# Altium PCB PCB1.PcbDoc
Units mm, origin at the board's own origin, x right, y up, seen from the top; angles counter-clockwise.
Board outline 89 x 54 mm, 2 copper layers (Top Layer, Bottom Layer); 38 components, 39 nets, 157 pads, 24 vias.
Unrouted connection lines stored in the file: 1.
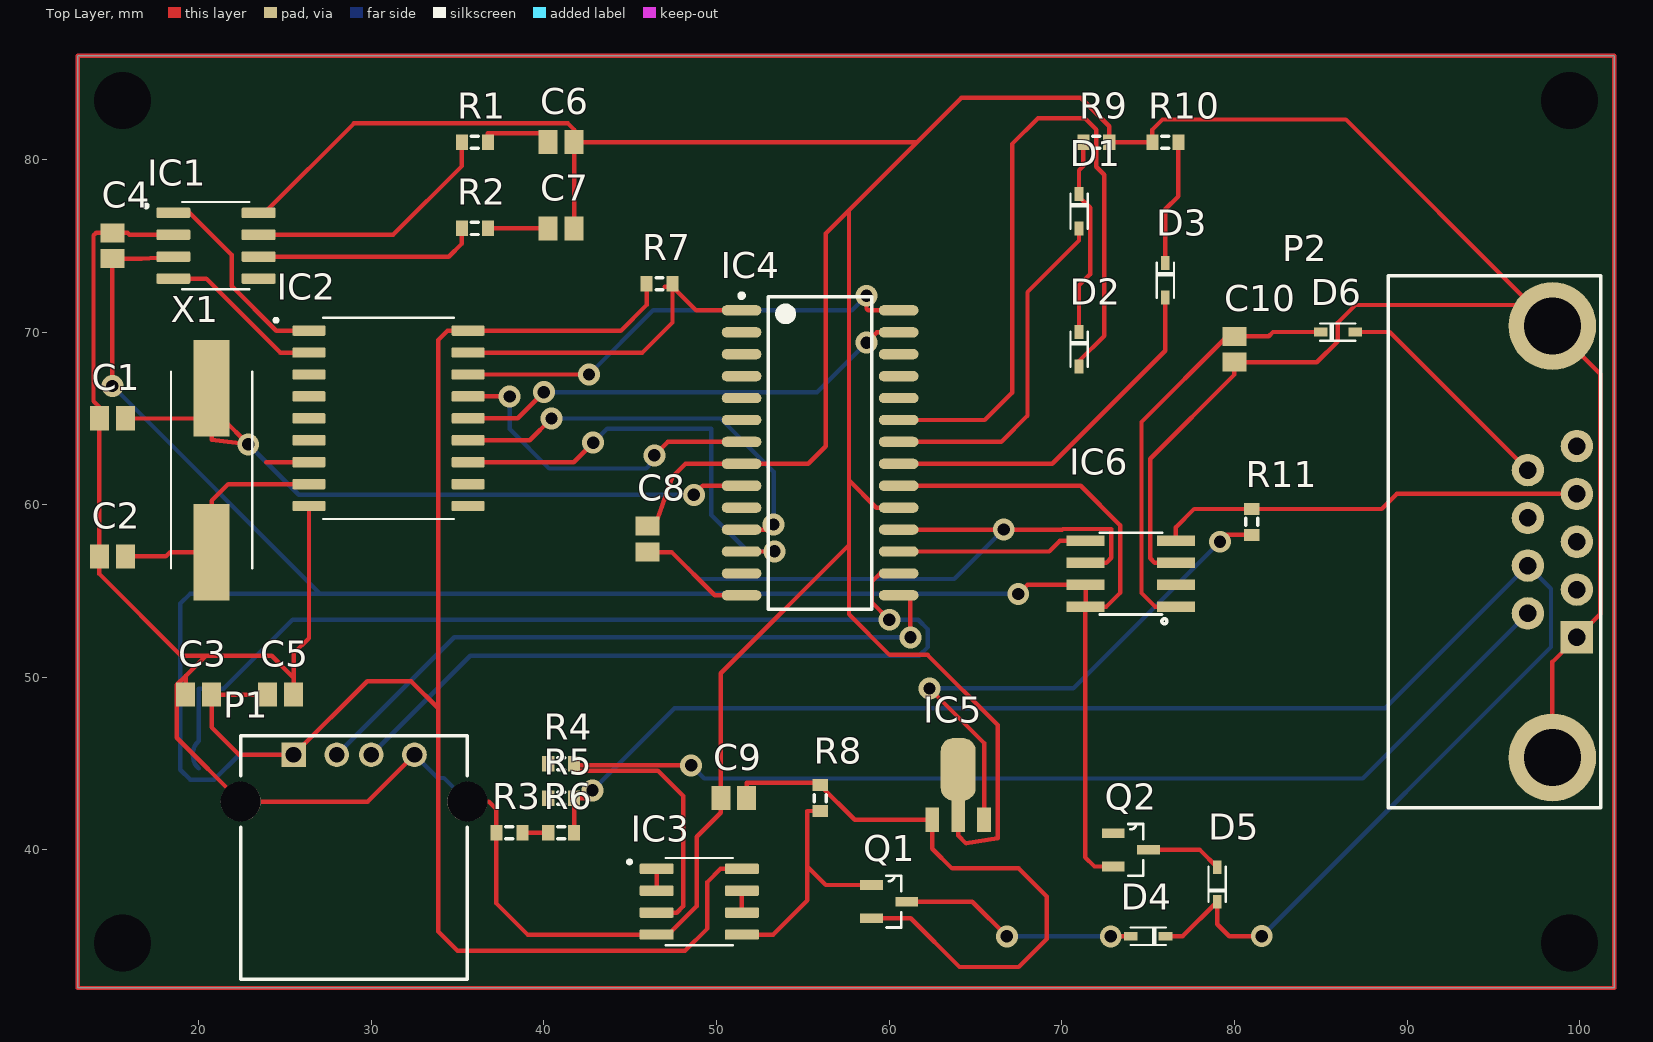
[diagram p0: Top Layer view]
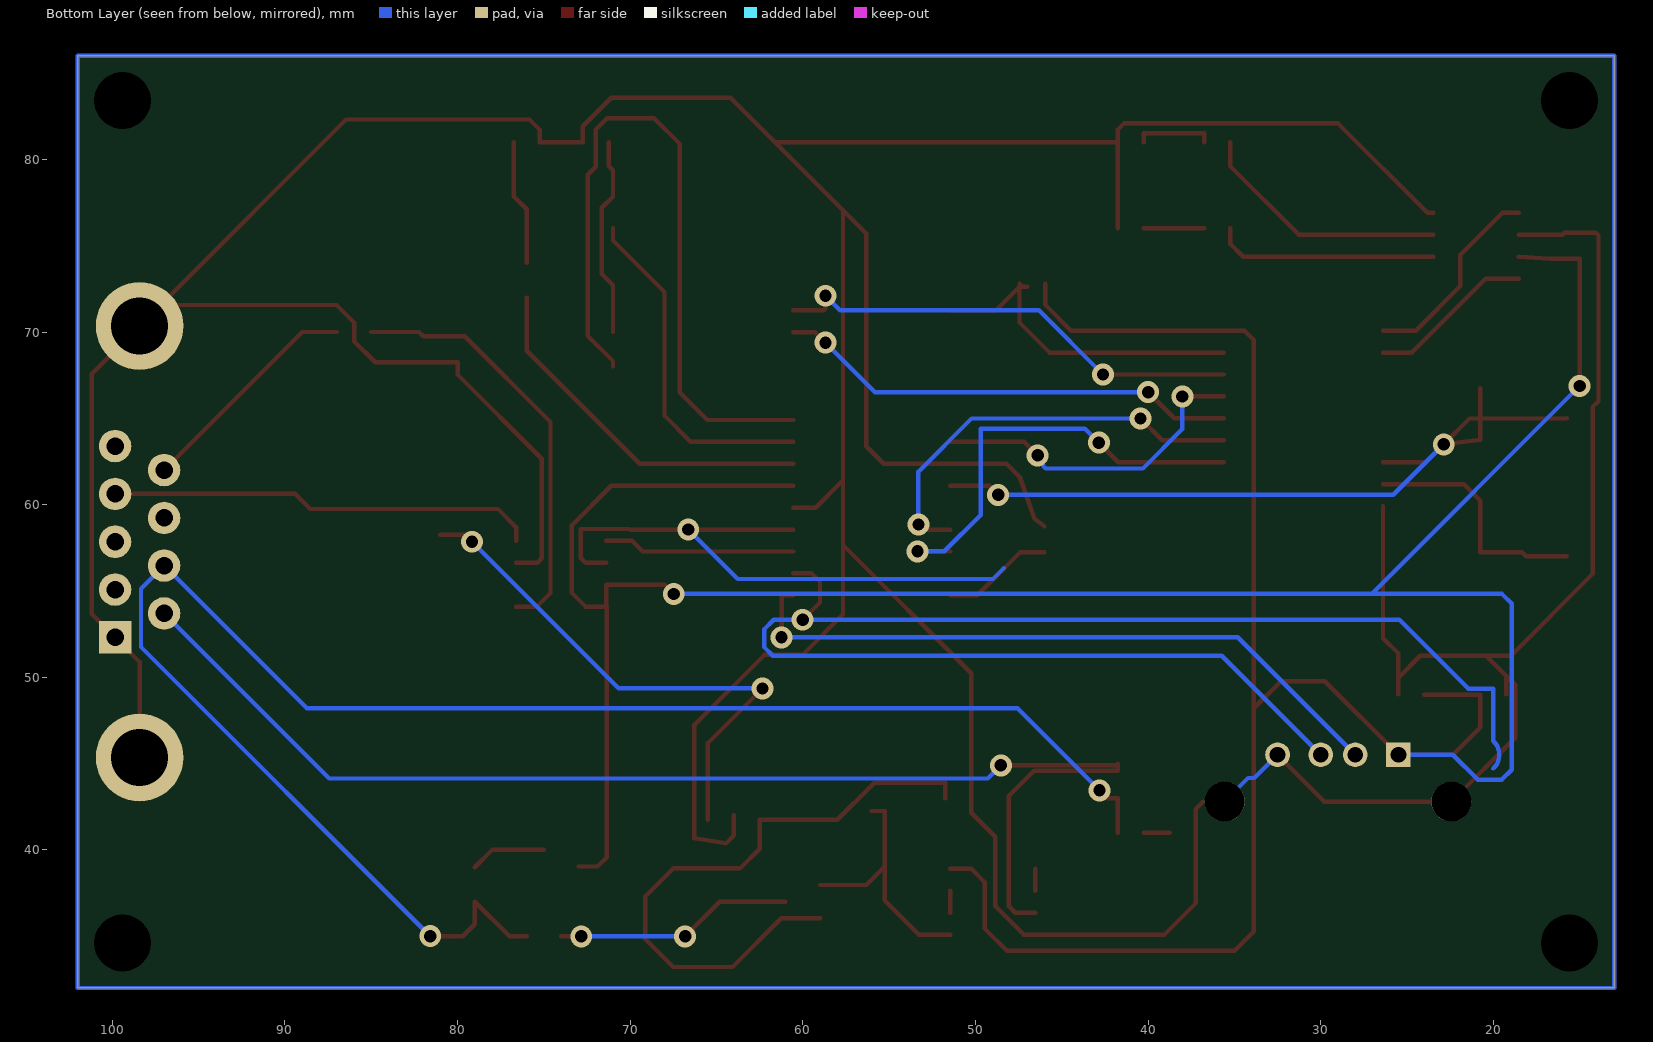
[diagram p1: Bottom Layer view, seen from below]

## Layer stack, top to bottom
Top Solder: solder mask 0.0102, Solder Resist, Dk 3.5
Top Layer: signal copper 0.0356
Dielectric 1: dielectric 0.32, FR-4, Dk 4.8
Bottom Layer: signal copper 0.0356
Bottom Solder: solder mask 0.0102, Solder Resist, Dk 3.5

## Board outline
13,32 13,86 102,86 102,32

## Design rules (kind name [scope] priority, off if disabled: settings)
Clearance [All] p1: gap=0.254 ignorepadtopadclearanceinfootprint=FALSE except(0: Arc-Hole Track-Hole SMDPad-Hole THPad-Hole Via-Hole Fill-Hole Poly-Hole Region-Hole Text-Hole)
PolygonConnect [All] p1: connectstyle=Relief reliefconductorwidth=0.254 reliefentries=4 polygonreliefangle="90 Angle" airgapwidth=0.254
RoutingVias [All] p1: holewidth=0.711 width=1.27 viastyle="Through Hole" minholewidth=0.711 minwidth=1.27 maxholewidth=0.711 maxwidth=1.27
SolderMaskExpansion [All] p1: expansion=0.102 istentingtop=FALSE
Width [All] p1: maxlimit=0.254 minlimit=0.254 preferedwidth=0.254
30 further rules are at their usual default settings.

## Components (designator, comment, footprint, x,y, rotation, side; value= is the part's Value field where it differs from the comment)
C1 "22pF" C0805 15,65 r0 top
C2 "22pF" C0805 15,57 r0 top
C3 "100nF" C0805 20,49 r180 top
C4 "100nF" C0805 15,75 r90 top
C5 "10uF" C0805 24.75,49 r0 top
C6 "560pF" C0805 41,81 r0 top
C7 "560pF" C0805 41,76 r0 top
C8 "470nF" C0805 46,58 r90 top
C9 "100nF" C0805 51,43 r180 top
C10 "100nF" C0805 80,69 r270 top
D1 "Diode" 1N4148 71,77 r90 top
D2 "Diode" 1N4148 71,69 r90 top
D3 "Diode" 1N4148 76,73 r90 top
D4 "Diode" 1N4148 75,35 r0 top
D5 "Diode" 1N4148 79,38 r270 top
D6 "Diode" 1N4148 86,70 r180 top
IC1 "MCP2551" SOIC127P599X175-8N 21,75 r0 top
IC2 "MCP2515" MCP2515 31,65 r0 top
IC3 "SN75452B" SOIC127P599X175-8N 49,37 r0 top
IC4 "PIC18F2455" SOIC-SO28_N 56,63 r0 top
IC5 "L78L08" L78L08 64,43.727 r0 top
IC6 "MC33290" SO08 74,56 r90 top
P1 "USB" USB-A1HSW6 29,39 r0 top
P2 "DB9-M" DB9 98.42,57.85 r90 top
Q1 "BS250" BS250FTA 60,37 r0 top
Q2 "BS250" BS250FTA 74,40 r0 top
R1 "100" J1-0603 36,81 r0 top
R2 "100" J1-0603 36,76 r0 top
R3 "22K" J1-0603 38,41 r0 top
R4 "10K" J1-0603 41,45 r0 top
R5 "10K" J1-0603 41,43 r0 top
R6 "10K" J1-0603 41,41 r0 top
R7 "100" J1-0603 46.7,72.8 r0 top
R8 "4.7K" J1-0603 56,43 r90 top
R9 "330" J1-0603 72,81 r0 top
R10 "330" J1-0603 76,81 r180 top
R11 "510" J1-0603 81,59 r270 top
X1 "16MHZ" X-16.000MHZ-B4 20.75,62 r90 top

## Footprints (in the part's own frame and the unit in brackets; to place one, negate y for a bottom-side part, rotate by r counter-clockwise, add the part's x,y. Pads: shape width x height; smd on the part's side, far side on the other; paste and mask are expansions set on the pad)
1N4148 [mm]
  rect 0.8x0.5 smd: 1(-1,0) 2(1,0)
  silkscreen extent -1.02,-0.5 1.02,0.5, body extent -1.83,-0.77 1.83,0.77, height 0.8
BS250FTA [mil]
  rect 52x22 smd: 1(-40,38) 2(-40,-38) 3(40,0)
  silkscreen extent -6,-59 28,59
C0805 [mm] "Chip Capacitor, Body 2.0x1.3mm, IPC High Density"
  rect 1.1x1.4 smd: 1(-0.75,0) 2(0.75,0)
  body extent -1.1,-0.72 1.1,0.72, height 1.4
DB9 [mil]
  rect 74x74 hole 40: 1(-218.11,-55.9)
  round 74 hole 40: 2(-109.06,-55.9) 3(0,-55.9) 4(109.05,-55.9) 5(218.11,-55.9) 6(-163.39,55.91) 7(-54.33,55.91) 8(54.33,55.91) 9(163.39,55.91)
  round 200 hole 130: G1(-492.13,0) G2(492.13,0)
  silkscreen extent -606,-110 606,374
J1-0603 [mm] "Chip Resistor, Body 1.6x0.8mm, IPC High Density"
  rect 0.7x0.9 smd: 1(-0.75,0) 2(0.75,0)
  silkscreen extent -0.2,-0.35 0.2,0.35, body extent -0.85,-0.48 0.85,0.48, height 0.9
L78L08 [mm]
  rect 0.8x1.4 smd: 1(-1.499,-1.981) 3(1.499,-1.981)
  rect 0.8x1.9 smd paste-2 mask+0: 2(0,-1.727)
  rrect75% 2.032x3.65 smd: 2@1(0,0.94)
MCP2515 [mm]
  rrect25% 1.91x0.6 smd: 1(-4.61,5.08) 2(-4.61,3.81) 3(-4.61,2.54) 4(-4.61,1.27) 5(-4.61,0) 6(-4.61,-1.27) 7(-4.61,-2.54) 8(-4.61,-3.81) 9(-4.61,-5.08) 10(4.61,-5.08) 11(4.61,-3.81) 12(4.61,-2.54) 13(4.61,-1.27) 14(4.61,0) 15(4.61,1.27) 16(4.61,2.54) 17(4.61,3.81) 18(4.61,5.08)
  silkscreen extent -6.62,-5.83 3.8,5.83
SO08 [mil]
  rect 24x87 smd: 1(-75,-103) 2(-25,-103) 3(25,-103) 4(75,-103) 5(75,103) 6(25,103) 7(-25,103) 8(-75,103)
  silkscreen extent -114,-82 93,71, body extent -196,-69 196,106, height 775
SOIC127P599X175-8N [mm]
  rrect25% 1.97x0.6 smd: 1(-2.47,1.905) 2(-2.47,0.635) 3(-2.47,-0.635) 4(-2.47,-1.905) 5(2.47,-1.905) 6(2.47,-0.635) 7(2.47,0.635) 8(2.47,1.905)
  silkscreen extent -4.14,-2.53 1.95,2.53, body extent -3,-2.45 3,2.45, height 1.75
SOIC-SO28_N [mm] "SOIC, 28-Leads, Body 17.9x7.5mm, Pitch 1.27mm, IPC Medium Density"
  oval 2.3x0.6 smd: 1(-4.55,8.255) 2(-4.55,6.985) 3(-4.55,5.715) 4(-4.55,4.445) 5(-4.55,3.175) 6(-4.55,1.905) 7(-4.55,0.635) 8(-4.55,-0.635) 9(-4.55,-1.905) 10(-4.55,-3.175) 11(-4.55,-4.445) 12(-4.55,-5.715) 13(-4.55,-6.985) 14(-4.55,-8.255) 15(4.55,-8.255) 16(4.55,-6.985) 17(4.55,-5.715) 18(4.55,-4.445) 19(4.55,-3.175) 20(4.55,-1.905) 21(4.55,-0.635) 22(4.55,0.635) 23(4.55,1.905) 24(4.55,3.175) 25(4.55,4.445) 26(4.55,5.715) 27(4.55,6.985) 28(4.55,8.255)
  silkscreen extent -4.67,-9.05 3,9.23, body extent -3.8,-9.06 3.8,9.06, height 2.65
USB-A1HSW6 [mm]
  rect 1.428x1.428 hole 0.92: 1(-3.5,6.51)
  round 1.428 hole 0.92: 2(-1,6.51) 3(1,6.51) 4(3.5,6.51)
  round 2.3 hole 2.3 unplated: S1(-6.57,3.8) S2(6.57,3.8)
  silkscreen extent -6.55,-6.5 6.55,7.6
X-16.000MHZ-B4 [mm]
  rect 5.6x2.1 smd: 1(-4.75,0) 2(4.75,0)
  silkscreen extent -5.7,-2.35 5.7,2.35, body extent -6.35,-2.35 6.35,2.35, height 4.06

## Part data
C1 C2 C6 C7: library part Cap, "Capacitor", LatestRevisionDate=29-May-2009, LatestRevisionNote="IPC-7351 Footprint Added.", PackageDescription="Chip Capacitor", PackageReference=C0805, Published=8-Jun-2000, Publisher="Altium Limited"
C3 C4 C5 C8 C9 C10: library part "Cap External", "Capacitor with a designated external electrode", LatestRevisionDate=29-May-2009, LatestRevisionNote="IPC-7351 Footprint Added.", PackageDescription="Chip Capacitor", PackageReference=C0805, Published=8-Jun-2000, Publisher="Altium Limited"
D1 D2 D3 D4 D5 D6: "Default Diode", Code_JEDEC=DO-214-AB, LatestRevisionDate=17-Jul-2002, LatestRevisionNote="Re-released for DXP Platform.", PackageDescription="DO-214-AB/SMC; 2 C-Bend Leads; Body 7.9 x 5.9 mm, inc. leads (LxW)", PackageReference=SMC, PackageVersion=Sep-1996, Published=8-Jun-2000, Publisher="Altium Limited"
IC1: library part MCP2551-I/SN, Package=None, Availability=Unavailable, MP=MCP2551-I/SN, Price=None
IC2: library part MCP2515-E/SO, "CANbus Controller CAN 2.0 SPI Interface 18-SOIC", Package="SOIC-18 Microchip", Availability=Unavailable, MF=Microchip, MP=MCP2515-E/SO, Price=None, SnapEDA_Link=https://www.snapeda.com/parts/MCP2515-E/SO/Microchip/view-part/100602/?ref=snap
IC3: library part SN75452BD, "30-V Dual output driver with NAND logic inputs", Package="SOIC-8 Texas Instruments", Availability="In Stock", Check_prices=https://www.snapeda.com/parts/SN75452BD/Texas+Instruments/view-part/?ref=eda, MF="Texas Instruments", MP=SN75452BD, Price=None, Purchase-URL=https://pricing.snapeda.com/search/part/SN75452BD/?ref=eda, SnapEDA_Link=https://www.snapeda.com/parts/SN75452BD/Texas+Instruments/view-part/?ref=snap
IC4: library part PIC18F2455-I/SO, "High Performance, Enhanced Flash, USB Microcontroller with nanoWatt Technology, 24K Flash, 28-Pin SOIC, Industrial Temperature Range", Supplier Part Number 1=PIC18F2455-I/SO-ND, Code_JEDEC=MS-013, ComponentLink1Description=Datasheet, ComponentLink1URL=http://ww1.microchip.com/downloads/en/DeviceDoc/39632e.pdf, ComponentLink2Description="Packaging Specification", ComponentLink2URL=http://www.microchip.com/stellent/groups/techpub_sg/documents/packagingspec/en012702.pdf, ComponentLink3Description="Microchip.com Home", ComponentLink3URL=http://www.microchip.com/, DatasheetVersion="revE, Aug-2008", LatestRevisionDate=02-Dec-2009, LatestRevisionNote="Updated to datasheet revision E, Aug-2008", PackageDescription="28-Lead Plastic Small Outline (SO) - Wide 7.50mm Body [SOIC]", PackageReference=SOIC-SO28, PackageVersion="revBB, Aug-2009", Published=29-Jan-2009, Publisher="Altium Limited", Supplier 1=Digi-Key, Supplier 2=Farnell, Supplier Part Number 2=1579598
IC5: library part L78L05ACU, "Linear Voltage Regulator IC 1 Output 100mA SOT-89-3", Package="SOT-89-3 STMicroelectronics", Availability=Unavailable, MF=STMicroelectronics, MP=L78L05ACU, Price=None, SnapEDA_Link=https://www.snapeda.com/parts/L78L05ACU/STMicroelectronics/view-part/1236826/?ref=snap
IC6: "Heat Sink; Packages Cooled:TO-220; Thermal Resistance:8.8Â°C/W; Width:34.5mm; Height:50mm; Length:12.5mm; Mounting Type:PC Board Thru Hole; Package / Case:TO-220 ;RoHS Compliant: Yes", Package="TO-220-3 ON Semiconductor", Availability="In Stock", Check_prices=https://www.snapeda.com/parts/MC33290/NXP+USA+Inc./view-part/?ref=eda, MF="NXP USA", MP=MC33290, Price=None, SnapEDA_Link=https://www.snapeda.com/parts/MC33290/NXP+USA+Inc./view-part/?ref=snap
P1: library part USB-A1HSW6, "USB - A Receptacle Connector 4 Position Through Hole, Right Angle", Package=None, Availability=Unavailable, MP=USB-A1HSW6, Price=None
Q1 Q2: library part BS250FTA, "P-Channel 45V 90mA (Ta) 330mW (Ta) Surface Mount SOT-23-3", Package="SOT-23-3 Diodes Inc.", Availability=Unavailable, DigiKey-Purchase-URL=https://snapeda.com/shop?store=DigiKey&id=699, MF="Diodes Inc.", MP=BS250FTA, Price=None, SnapEDA_Link=https://www.snapeda.com/parts/BS250FTA/Diodes%20Inc./view-part/699/?ref=snap
R1 R2 R3 R4 R5 R6 R7 R8 R9 R10 R11: library part Res3, "Resistor", LatestRevisionDate=29-May-2009, LatestRevisionNote="IPC-7351 Footprint Added.", PackageDescription="Chip Resistor", PackageReference=J1-0603, Published=8-Jun-2000, Publisher="Altium Limited"
X1: library part ABLS-16.000MHZ-B4, "16 MHz Â±30ppm Crystal 18pF 40 Ohms HC-49/US", Package="HC-49/US Abracon LLC", Availability="In Stock", Check_prices=https://www.snapeda.com/parts/ABLS-16.000MHZ-B4/Abracon/view-part/?ref=eda, MF=Abracon, MP=ABLS-16.000MHZ-B4, Price=None, Purchase-URL=https://pricing.snapeda.com/search/part/ABLS-16.000MHZ-B4/?ref=eda, SnapEDA_Link=https://www.snapeda.com/parts/ABLS-16.000MHZ-B4/Abracon/view-part/?ref=snap

## Free pads (board coordinates)
  round 2.5 hole 3.302: 1(15.6,34.6) 1(15.6,83.4) 1(99.4,34.6) 1(99.4,83.4)

## Via types
v1: diameter 1.27, hole 0.711, Top Layer to Bottom Layer, 24 vias

## Nets (pads, with @x,y where several pads share a name; then routed paths per layer and width w, separated by ;. In a path a pad name is that pad's centre, name@x,y a point inside that pad or via, vN(x,y) a via of type N, cw(c..) or ccw(c..) an arc to the next point about the centre after c; other vN are vias at no path point)
+5: C3.1 C4.1 C5.1 IC1.3 IC2.18 IC3.8 IC4.20 IC6.7 IC6.8 P1.1 Q2.2 R7.1 | length 226.9
  Top Layer w0.254: C4.1 C4.1@15.002,74.25 ; v1(15.002,66.869) C4.1@15.002,74.25 ; IC1.3 16.704,74.25 C4.1@15.002,74.25 ; C3.1 C3.1@20.75,48.987 ; C5.1 24,48.987 C3.1@20.75,48.987 ; R7.1 45.95,71.568 44.462,70.08 IC2.18 34.418,70.08 33.874,69.536 33.874,48.2 ; IC3.8 50.232,38.905 49.47,38.143 49.47,35.449 48.175,34.154 34.992,34.154 33.874,35.271 33.874,48.2 ; IC4.20 71.096,61.095 73.378,58.813 73.378,54.889 72.584,54.095 IC6.8 ; v1(67.476,54.829) 68.012,55.365 IC6.7 IC6.8 ; Q2.2 71.894,39.035 71.365,39.564 71.365,54.095 IC6.8 ; C3.1@20.75,48.987 20.75,47.1 22.34,45.51 P1.1 29.76,49.77 32.305,49.77 33.874,48.2
  Bottom Layer w0.254: v1(15.002,66.869) 27.042,54.829 ; P1.1 22.345,45.51 20.895,44.06 19.523,44.06 18.939,44.644 18.939,54.271 19.498,54.829 27.042,54.829 ; v1(67.476,54.829) 27.042,54.829
+12: IC5.3 R11.2 | length 31.3
  Top Layer w0.254: v1(62.335,49.356) 65.499,46.192 IC5.3 ; v1(79.163,57.852) 79.561,58.25 R11.2
  Bottom Layer w0.254: v1(62.335,49.356) 70.666,49.356 v1(79.163,57.852)
GND: C1.1 C2.1 C3.2 C4.2 C5.2 C6.2 C7.2 C8.2 C9.2 C10.2 IC1.2 IC1.8 IC2.9 IC3.4 IC4.8 IC4.19 IC5.2 IC6.3 P1.4 P1.S1 P1.S2 P2.1 P2.G1 P2.G2 R3.1 R9.2 R10.2 | length 355.8
  Top Layer w0.254: IC1.2 15.993,75.635 15.878,75.75 C4.2 14.062,75.75 13.91,75.598 13.91,65.99 14.25,65.65 C1.1 C2.1 14.25,55.98 18.982,51.248 20.418,51.248 ; C3.2 19.25,50.08 ; IC1.8 23.816,76.905 28.995,82.084 41.394,82.084 41.75,81.728 C6.2 C6.2@41.75,80.996 ; C5.2 25.5,49.979 ; IC2.9 26.39,52.264 25.5,51.374 25.5,49.979 ; P1.4 29.79,42.8 P1.S1 18.736,46.494 18.736,49.566 19.25,50.08 ; P1.S2 36.808,42.8 37.25,42.358 R3.1 37.25,36.901 39.056,35.095 IC3.4 47.209,35.095 48.86,36.746 48.86,40.758 50.25,42.147 C9.2 50.25,50.232 57.673,57.655 ; C7.2 41.75,78.477 C6.2@41.75,80.996 ; C8.2 46.573,59.173 47.439,61.604 47.505,61.67 48.2,62.365 IC4.8 55.312,62.365 56.328,63.381 56.328,75.708 57.673,77.053 ; IC4.19 59.256,59.825 57.673,61.408 ; IC5.2 64,40.833 64.456,40.377 66.285,40.682 66.285,47.236 62.225,51.296 60.023,51.296 57.673,53.646 57.673,57.655 ; IC6.3 75.378,56.635 75.124,56.889 75.124,62.662 80.001,67.539 C10.2 84.776,68.25 85.995,69.469 85.995,70.552 87.011,71.568 P2.G2@97.202,71.568 ; P2.G1 98.42,50.89 P2.1 101.184,53.654 101.184,67.586 P2.G2 P2.G2@97.202,71.568 ; 19.25,50.08 20.418,51.248 ; 20.418,51.248 24.23,51.248 25.5,49.979 ; C6.2@41.75,80.996 61.616,80.996 ; 57.673,57.655 57.673,61.408 ; 57.673,61.408 57.673,77.053 ; 57.673,77.053 61.616,80.996 ; 61.616,80.996 64.184,83.564 71.104,83.564 72.75,81.918 R9.2 R10.2 75.25,81.728 75.834,82.312 86.458,82.312 P2.G2@97.202,71.568
  Bottom Layer w0.254: P1.4 33.849,44.161 34.209,44.161 P1.S2
NetC1_2: C1.2 IC2.7 IC4.9 X1.2 | length 45.4
  Top Layer w0.254: C1.2 15.75,64.989 X1.2@20.75,64.989 ; X1.2 X1.2@20.75,64.989 ; 23.918,62.449 23.928,62.46 IC2.7 ; v1(48.683,60.57) 49.208,61.095 IC4.9 ; X1.2@20.75,64.989 21.378,64.989 v1(22.873,63.494) 20.75,63.766 X1.2@20.75,64.989
  Bottom Layer w0.254: v1(22.873,63.494) 23.918,62.449 ; 23.928,62.46 23.918,62.449 ; v1(48.683,60.57) 25.797,60.57 23.918,62.449
NetC2_2: C2.2 IC2.8 X1.1 | length 14.1
  Top Layer w0.254: C2.2 18.101,57 18.351,57.25 X1.1 20.75,60.229 21.71,61.19 IC2.8
NetC6_1: C6.1 R1.2 | length 4.5
  Top Layer w0.254: R1.2 36.75,81.525 40.25,81.525 C6.1
NetC7_1: C7.1 R2.2 | length 3.5
  Top Layer w0.254: R2.2 C7.1
NetC8_1: C8.1 IC4.14 | length 6.5
  Top Layer w0.254: C8.1 47.397,57.25 49.902,54.745 IC4.14
NetC9_1: C9.1 IC5.1 Q1.2 R8.2 | length 36.4
  Top Layer w0.254: C9.1 51.75,43.895 55.855,43.895 R8.2 58.004,41.746 IC5.1 62.501,40.072 63.644,38.929 67.504,38.929 69.13,37.303 69.13,34.84 67.504,33.214 64.075,33.214 61.254,36.035 Q1.2
NetC10_1: C10.1 D6.2 IC6.1 | length 24.8
  Top Layer w0.254: IC6.1 75.401,54.095 74.616,54.88 74.616,64.786 79.58,69.75 C10.1 81.986,69.75 82.236,70 D6.2
NetD1_1: D1.1 IC4.22 | length 20.2
  Top Layer w0.254: IC4.22 66.488,63.635 68.012,65.159 68.012,72.314 71,75.302 D1.1
NetD1_2: D1.2 D2.2 R9.1 | length 11.6
  Top Layer w0.254: D2.2 71,72.711 71.644,73.355 71.644,77.198 71,77.842 D1.2 71,79.366 71.25,79.616 R9.1
NetD2_1: D2.1 IC4.23 | length 41.9
  Top Layer w0.254: IC4.23 65.54,64.905 67.123,66.488 67.123,80.89 68.622,82.388 71.339,82.388 72,81.728 72,79.569 72.457,79.112 72.457,69.774 71,68.317 D2.1
NetD3_1: D3.1 IC4.21 | length 21.2
  Top Layer w0.254: IC4.21 69.452,62.365 76,68.913 D3.1
NetD3_2: D3.2 R10.1 | length 7.3
  Top Layer w0.254: D3.2 76,77.105 76.75,77.855 R10.1
NetD4_1: D4.1 Q1.3 | length 13.8
  Top Layer w0.254: Q1.3 64.812,37 v1(66.82,34.992) ; v1(72.838,34.992) 72.846,35 D4.1
  Bottom Layer w0.254: v1(66.82,34.992) v1(72.838,34.992)
NetD4_2: D4.2 D5.2 P2.7 R5.2 R6.2 | length 99.8
  Top Layer w0.254: R6.2 R5.2 42.365,43 v1(42.815,43.45) ; D4.2 77,35 D5.2 79,35.696 79.696,35 v1(81.584,35)
  Bottom Layer w0.254: v1(42.815,43.45) 47.565,48.2 88.73,48.2 P2.7 98.34,55.13 98.34,51.756 v1(81.584,35)
NetD5_1: D5.1 Q2.3 | length 4.4
  Top Layer w0.254: Q2.3 78,40 D5.1
NetD6_1: D6.1 P2.9 | length 13.3
  Top Layer w0.254: D6.1 89,70 P2.9
NetIC1_1: IC1.1 IC2.1 | length 11.7
  Top Layer w0.254: IC1.1 19.473,76.905 21.911,74.467 21.911,72.66 24.491,70.08 IC2.1
NetIC1_4: IC1.4 IC2.2 | length 9.6
  Top Layer w0.254: IC1.4 20.445,73.095 24.73,68.81 IC2.2
NetIC1_6: IC1.6 R2.1 | length 13
  Top Layer w0.254: IC1.6 34.491,74.365 35.25,75.124 R2.1
NetIC1_7: IC1.7 R1.1 | length 14.8
  Top Layer w0.254: IC1.7 31.265,75.635 35.25,79.62 R1.1
NetIC2_12: IC2.12 IC4.12 | length 26.3
  Top Layer w0.254: IC2.12 41.723,62.46 v1(42.855,63.592) ; IC4.12 53.348,57.285 v1(53.356,57.293)
  Bottom Layer w0.254: v1(42.855,63.592) 43.668,64.405 49.691,64.405 49.704,59.4 49.7,59.397 51.804,57.293 v1(53.356,57.293)
NetIC2_13: IC2.13 IC4.11 | length 24.5
  Top Layer w0.254: IC2.13 39.183,63.73 v1(40.442,64.989) ; IC4.11 53.009,58.555 v1(53.305,58.852)
  Bottom Layer w0.254: v1(40.442,64.989) 50.224,64.989 53.305,61.908 v1(53.305,58.852)
NetIC2_14: IC2.14 IC4.27 | length 27
  Top Layer w0.254: IC2.14 38.482,65 v1(39.996,66.513) ; v1(58.69,69.384) 59.292,69.985 IC4.27
  Bottom Layer w0.254: v1(39.996,66.513) 55.82,66.513 v1(58.69,69.384)
NetIC2_15: IC2.15 IC4.7 | length 19.5
  Top Layer w0.254: IC2.15 v1(38.015,66.27) ; v1(46.397,62.856) 47.176,63.635 48.7,63.635 IC4.7
  Bottom Layer w0.254: v1(38.015,66.27) 38.015,64.38 40.301,62.094 45.932,62.094 46.081,62.243 46.081,62.265 46.397,62.581 v1(46.397,62.856)
NetIC2_16: IC2.16 IC4.28 | length 39.1
  Top Layer w0.254: IC2.16 v1(42.612,67.54) ; v1(58.69,72.101) 58.69,71.348 58.784,71.255 IC4.28
  Bottom Layer w0.254: v1(42.612,67.54) 46.327,71.255 ; 57.8,71.255 46.327,71.255 ; v1(58.69,72.101) 57.844,71.255 46.327,71.255
NetIC2_17: IC2.17 IC4.1 R7.2 | length 20.1
  Top Layer w0.254: IC2.17 37.938,68.81 45.708,68.81 47.45,70.552 R7.2@47.45,72.621 ; 47,72.63 R7.2@47.28,72.63 ; IC4.1 49.681,71.255 48.816,71.255 R7.2@47.45,72.621 ; R7.2@47.28,72.63 47.441,72.63 R7.2@47.45,72.621 ; R7.2@47.28,72.63 R7.2 R7.2@47.45,72.621
NetIC3_1: IC3.1 IC3.2 | length 1.3
  Top Layer w0.254: IC3.2 IC3.1
NetIC3_3: IC3.3 P2.6 R4.2 | length 74.9
  Top Layer w0.254: R4.2 R4.2@41.75,44.898 ; IC3.3 47.692,36.365 48.073,36.746 48.073,43.12 46.601,44.592 41.75,44.592 R4.2@41.75,44.898 ; v1(48.53,44.898) R4.2@41.75,44.898
  Bottom Layer w0.254: v1(48.53,44.898) 49.292,44.136 87.436,44.136 P2.6
NetIC3_5: IC3.5 Q1.1 R8.1 | length 14.7
  Top Layer w0.254: IC3.5 53.281,35.095 55.261,37.075 55.261,39.032 ; R8.1 55.261,42.25 55.261,39.032 ; Q1.1 56.328,37.965 55.261,39.032
NetIC3_6: IC3.6 IC3.7 | length 1.3
  Top Layer w0.254: IC3.6 IC3.7
NetIC4_15: IC4.15 P1.2 | length 39.2
  Top Layer w0.254: IC4.15 61.23,54.745 v1(61.23,52.315)
  Bottom Layer w0.254: P1.2 34.805,52.315 v1(61.23,52.315)
NetIC4_16: IC4.16 P1.3 | length 101.7
  Top Layer w0.254: v1(60.011,53.331) 59.007,54.335 59.007,55.545 59.478,56.015 IC4.16
  Bottom Layer w0.254: P1.3 35.738,51.248 61.738,51.248 62.246,51.756 62.246,52.772 61.687,53.331 v1(60.011,53.331) 25.442,53.331 21.454,49.343 20,49.343 20,46.308 ; 20,44.712 cw(c20.75,45.51) 20,46.308 ; 20,44.712 cw(c20.75,45.51) 20,46.308 ; 20,44.712 cw(c20.75,45.51) 20,46.308 ; 20,44.712 cw(c20.75,45.51) 20,46.308 ; 20,44.712 cw(c20.75,45.51) 20,46.308 ; 20,44.712 cw(c20.75,45.51) 20,46.308 ; 20,44.712 cw(c20.75,45.51) 20,46.308 ; 20,44.712 cw(c20.75,45.51) 20,46.308
NetIC4_17: IC4.17 IC6.5 | length 11.1
  Top Layer w0.254: IC4.17 69.272,57.285 69.892,57.905 IC6.5
NetIC4_18: IC4.18 IC6.6 | length 41.4
  Top Layer w0.254: v1(66.64,58.563) 66.632,58.555 IC4.18 70.01,58.555 70.046,58.591 72.87,58.591 72.87,56.921 72.584,56.635 IC6.6
  Bottom Layer w0.254: 48.352,56.328 48.987,55.693 63.77,55.693 v1(66.64,58.563)
NetIC6_4: IC6.4 P2.4 R11.1 | length 24.8
  Top Layer w0.254: IC6.4 76.597,57.905 76.597,58.683 77.664,59.75 R11.1 88.535,59.75 89.405,60.62 P2.4
NetR3_2: R3.2 R6.1 | length 1.5
  Top Layer w0.254: R3.2 R6.1
pads on no net: IC1.5 IC2.3 IC2.4 IC2.5 IC2.6 IC2.10 IC2.11 IC4.2 IC4.3 IC4.4 IC4.5 IC4.6 IC4.10 IC4.13 IC4.24 IC4.25 IC4.26 IC5.2@1 IC6.2 P2.2 P2.3 P2.5 P2.8 Q2.1 R4.1 R5.1

## Other copper
Multi-Layer:
  the board outline again, w0.254

## Silkscreen, mask and mechanical layers (free items; w line width, h text height)
Drill Drawing:
  circle w0.254: c14.556,9.61 r0.847
  lines w0.254: 13.709,1.144 14.556,1.567 15.403,1.144 14.979,1.99 15.403,2.837 14.556,2.413 13.709,2.837 14.133,1.99 13.709,1.144 ; 13.709,4.954 15.403,4.954 15.403,6.647 13.709,6.647 13.709,4.954 ; 13.709,14.267 15.403,14.267 14.556,12.574 13.709,14.267 ; 13.709,16.807 14.133,16.807 14.556,16.384 14.979,16.807 15.403,16.807 14.979,17.23 15.403,17.653 14.979,17.653 14.556,18.077 14.133,17.653 13.709,17.653 14.133,17.23 13.709,16.807
  lines w0.381: 12.19,0.001 280.188,0.001 ; 12.19,19.051 280.188,19.051 ; 26.183,-3.809 26.183,22.861 ; 39.895,-3.809 39.895,22.861 ; 69.604,-3.809 69.604,22.861 ; 82.454,-3.809 82.454,22.861 ; 101.092,-3.809 101.092,22.861 ; 139.181,-3.809 139.181,22.861 ; 154.163,-3.809 154.163,22.861 ; 173.106,-3.809 173.106,22.861 ; 189.612,-3.809 189.612,22.861 ; 211.298,-3.809 211.298,22.861 ; 245.171,-3.809 245.171,22.861 ; 12.19,-3.809 280.188,-3.809 280.188,22.861 12.19,22.861 12.19,-3.809
  text "Symbol" at 14.476,20.194 h1.83
  text "Count" at 27.326,20.194 h1.83
  text "Hole Size" at 41.038,20.194 h1.83
  text "Plated" at 70.747,20.194 h1.83
  text "Hole Type" at 83.597,20.194 h1.83
  text "Drill Layer Pair" at 102.235,20.194 h1.83
  text "Via/Pad" at 140.324,20.194 h1.83
  text "Pad Shape" at 155.306,20.194 h1.83
  text "Template" at 174.249,20.194 h1.83
  text "Description" at 190.755,20.194 h1.83
  text "Hole Tolerance (+)" at 212.441,20.194 h1.83
  text "Hole Tolerance (-)" at 246.314,20.194 h1.83
  text "2" at 27.326,16.384 h1.52
  text "90,55mil (2,300mm)" at 41.038,16.384 h1.52
  text "NPTH" at 70.747,16.384 h1.52
  text "Round" at 83.597,16.384 h1.52
  text "Top Layer - Bottom Layer" at 102.235,16.384 h1.52
  text "Pad" at 140.324,16.384 h1.52
  text "Rounded" at 155.306,16.384 h1.52
  text "c230hn230" at 174.249,16.384 h1.52
  text "4" at 27.326,12.574 h1.52
  text "36,22mil (0,920mm)" at 41.038,12.574 h1.52
  text "PTH" at 70.747,12.574 h1.52
  text "Round" at 83.597,12.574 h1.52
  text "Top Layer - Bottom Layer" at 102.235,12.574 h1.52
  text "Pad" at 140.324,12.574 h1.52
  text "(Mixed)" at 155.306,12.574 h1.52
  text "(Mixed)" at 174.249,12.574 h1.52
  text "6" at 27.326,8.764 h1.52
  text "130,00mil (3,302mm)" at 41.038,8.764 h1.52
  text "PTH" at 70.747,8.764 h1.52
  text "Round" at 83.597,8.764 h1.52
  text "Top Layer - Bottom Layer" at 102.235,8.764 h1.52
  text "Pad" at 140.324,8.764 h1.52
  text "Rounded" at 155.306,8.764 h1.52
  text "(Mixed)" at 174.249,8.764 h1.52
  text "9" at 27.326,4.954 h1.52
  text "40,00mil (1,016mm)" at 41.038,4.954 h1.52
  text "PTH" at 70.747,4.954 h1.52
  text "Round" at 83.597,4.954 h1.52
  text "Top Layer - Bottom Layer" at 102.235,4.954 h1.52
  text "Pad" at 140.324,4.954 h1.52
  text "(Mixed)" at 155.306,4.954 h1.52
  text "(Mixed)" at 174.249,4.954 h1.52
  text "24" at 27.326,1.144 h1.52
  text "28,00mil (0,711mm)" at 41.038,1.144 h1.52
  text "PTH" at 70.747,1.144 h1.52
  text "Round" at 83.597,1.144 h1.52
  text "Top Layer - Bottom Layer" at 102.235,1.144 h1.52
  text "Via" at 140.324,1.144 h1.52
  text "Rounded" at 155.306,1.144 h1.52
  text "v127h71" at 174.249,1.144 h1.52
  text "45 Total" at 27.326,-2.666 h1.52